# Altium PCB PCB2.PcbDoc
Units mm, origin at the board's own origin, x right, y up, seen from the top; angles counter-clockwise.
Board outline 80.26 x 88.77 mm, 2 copper layers (Top Layer, Bottom Layer), stack 1.1 mm thick; 35 components, 36 nets, 142 pads, 58 vias.
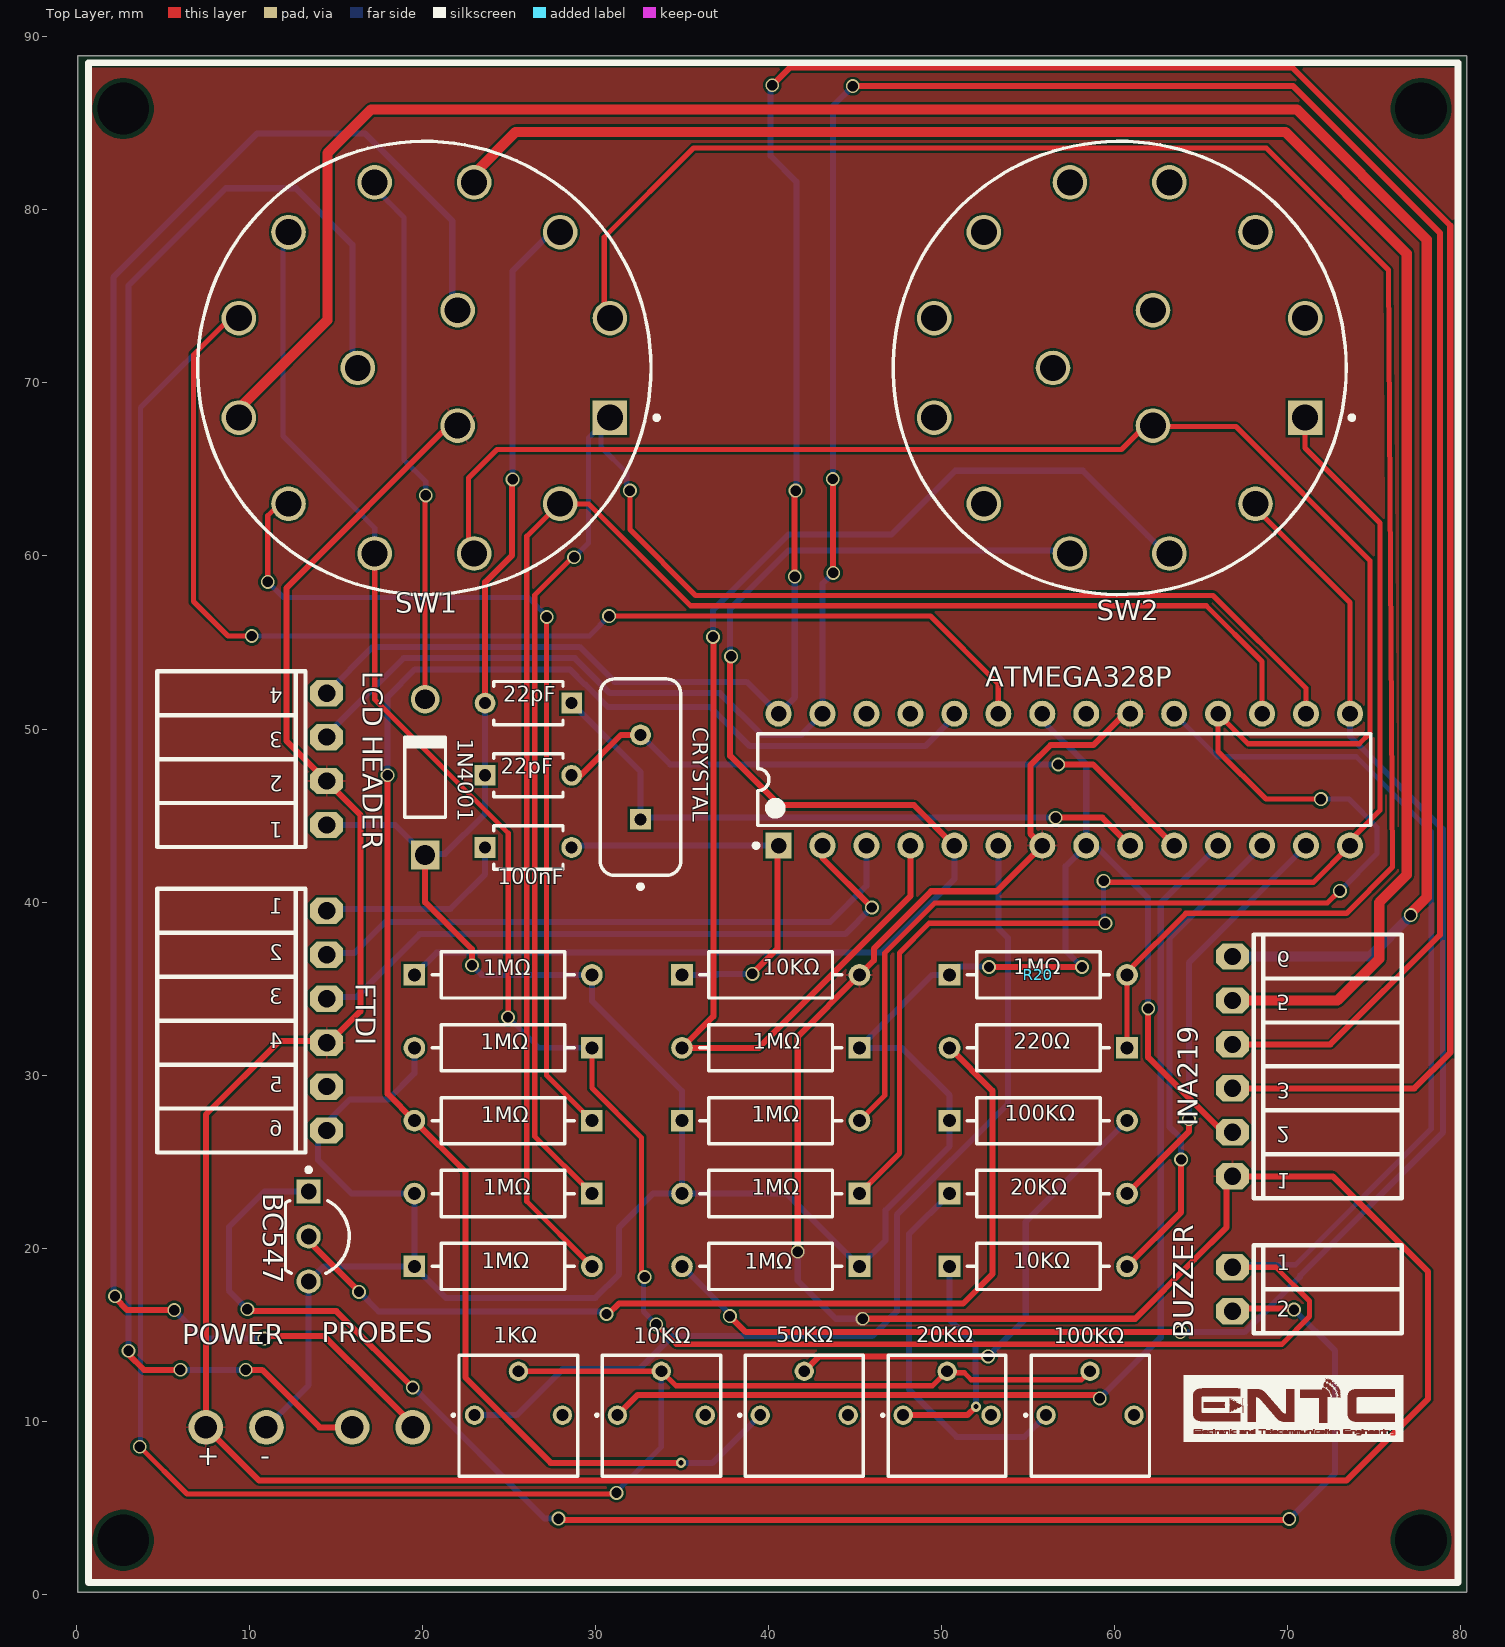
[diagram p0: Top Layer view]
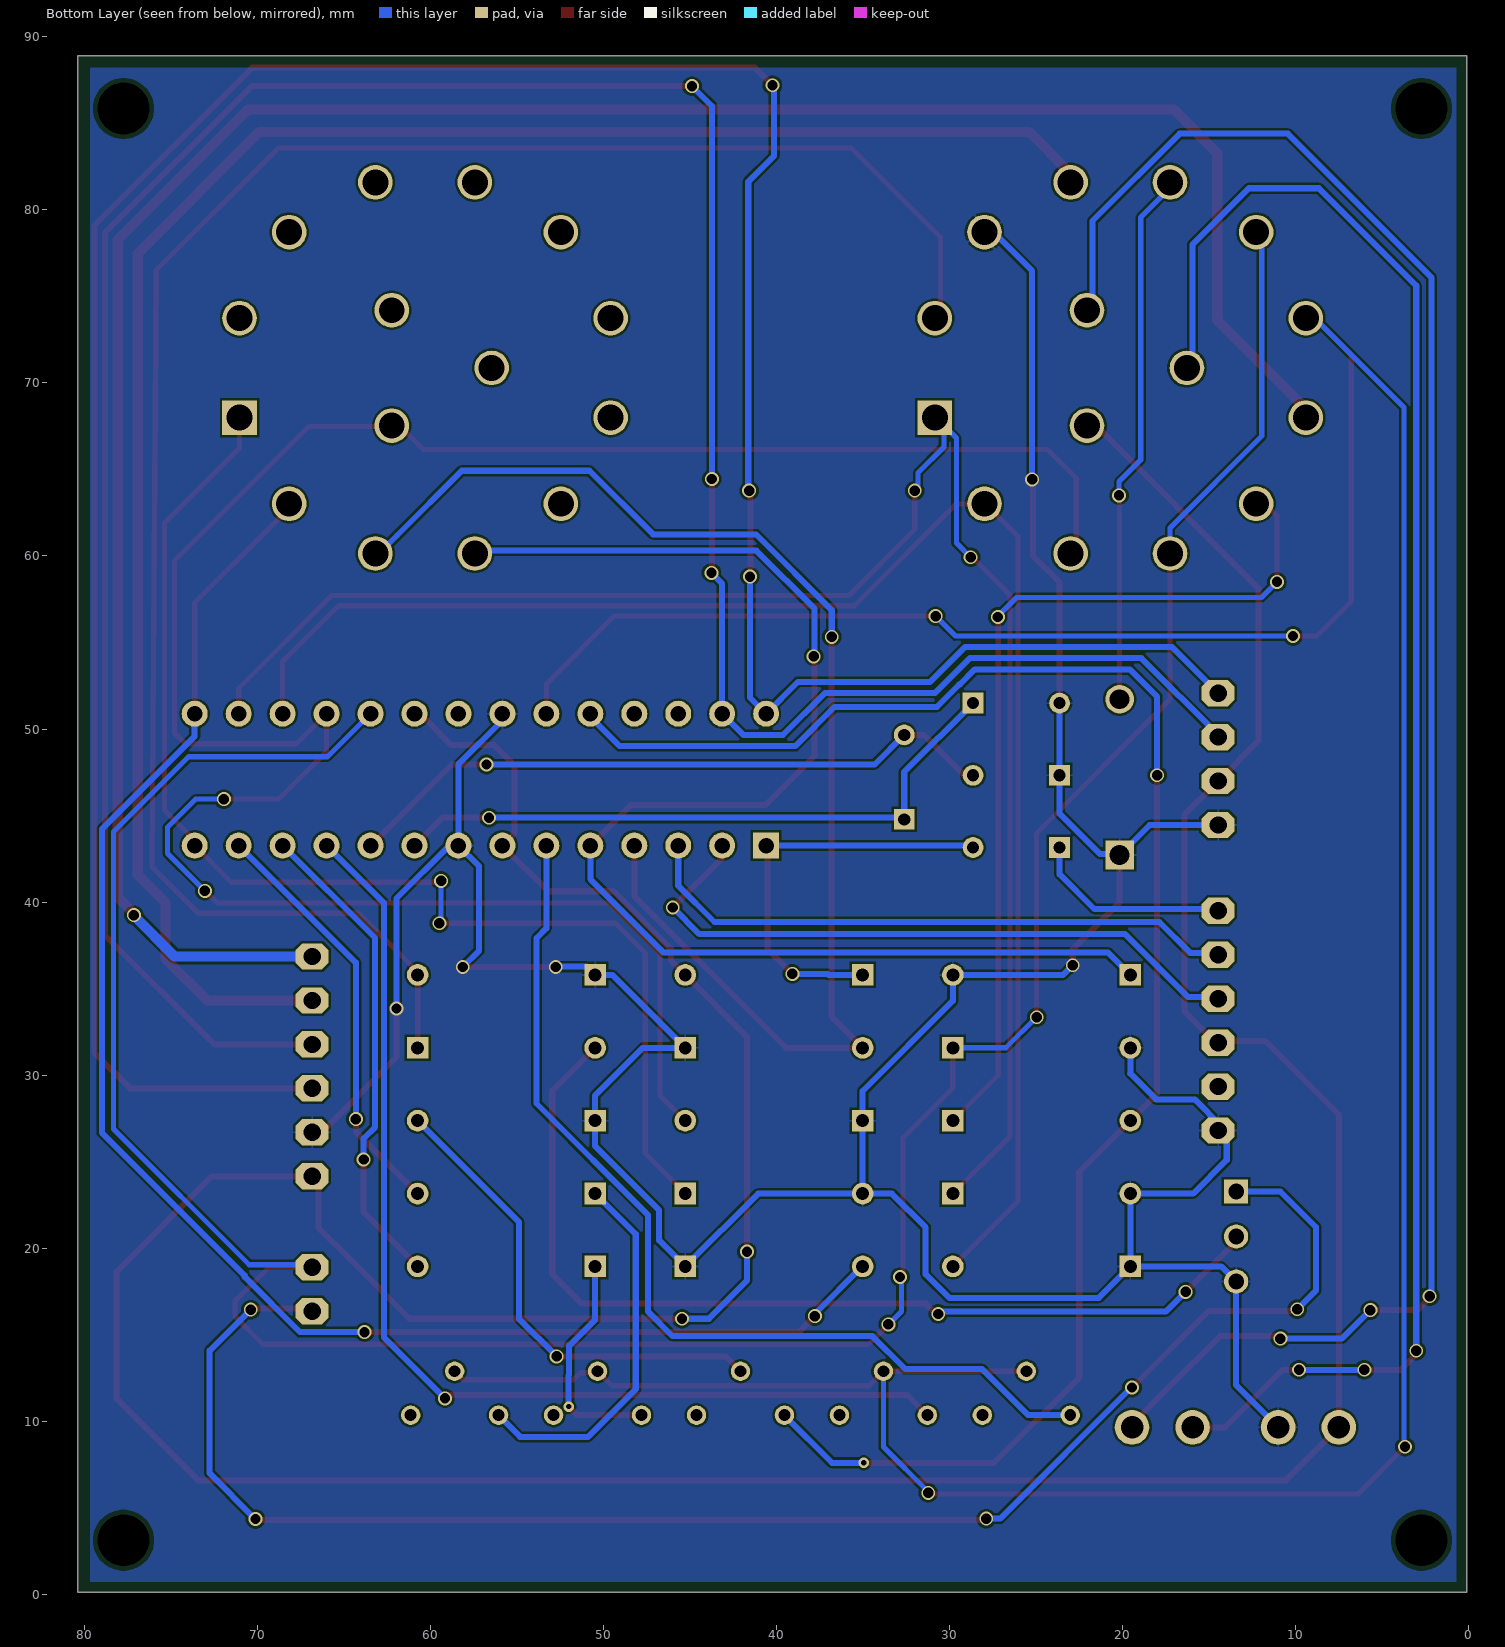
[diagram p1: Bottom Layer view, seen from below]
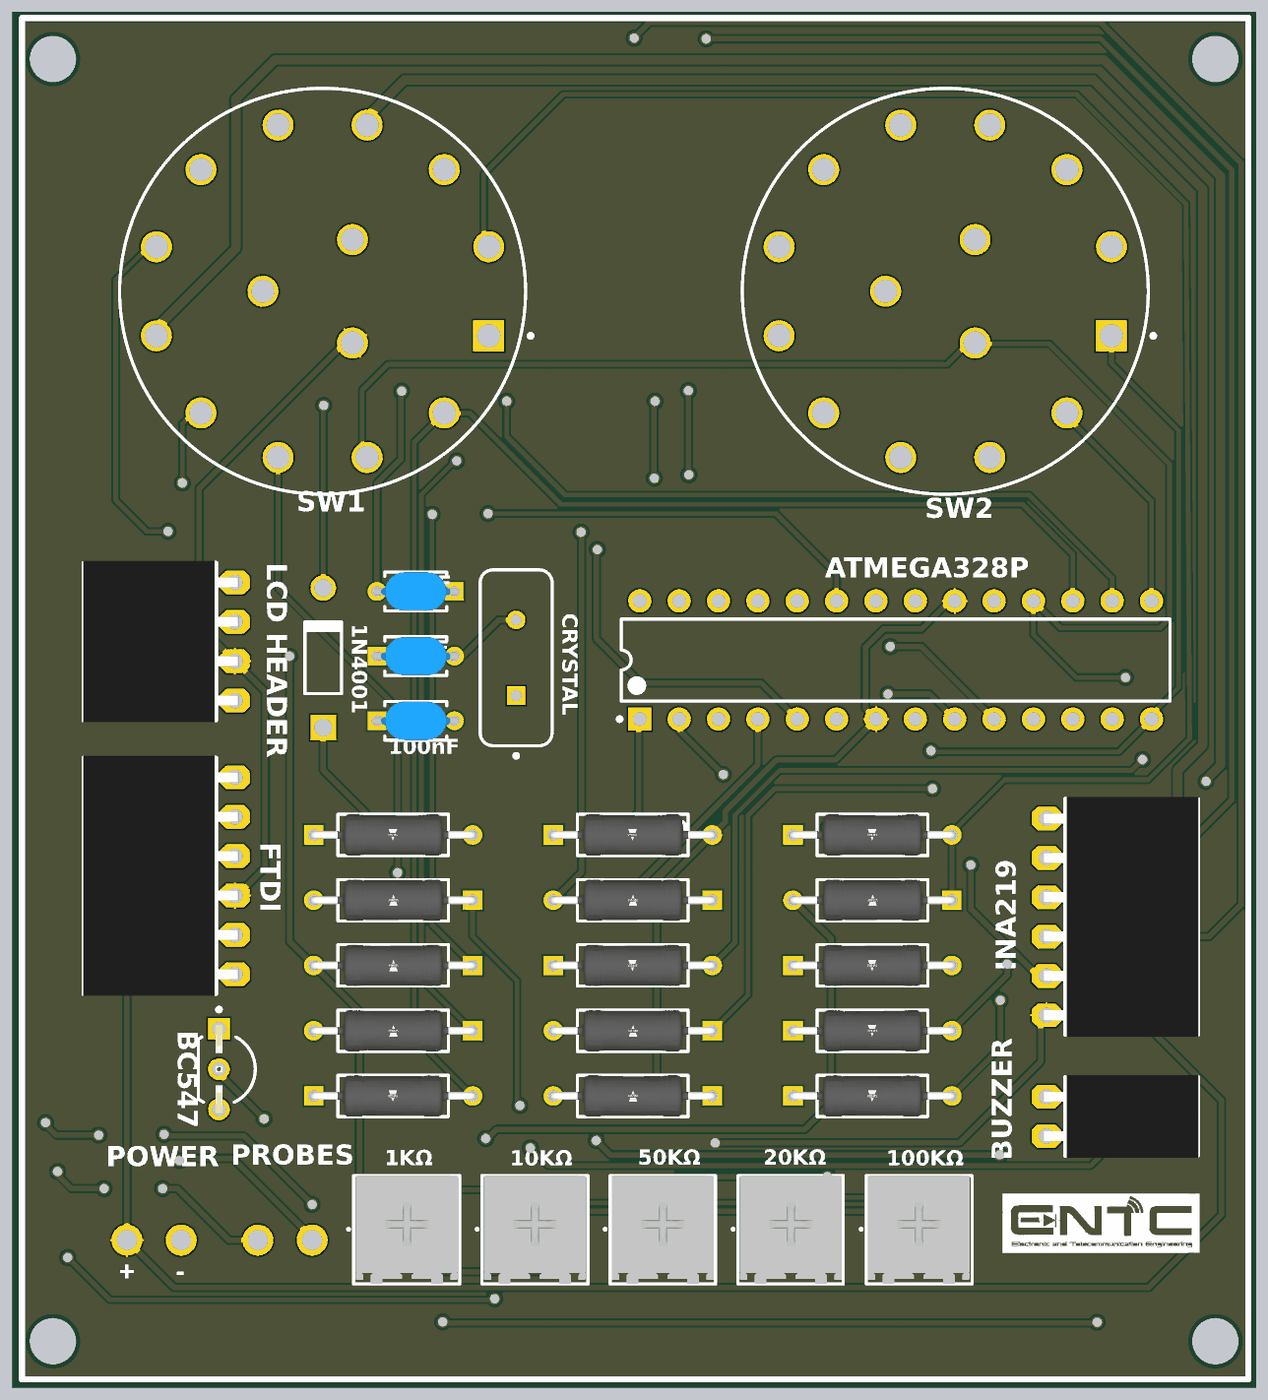
[diagram p2: 3D render of the assembled board from above, using the file's embedded part models]

## Layer stack, top to bottom
Top Solder: solder mask 0.05, Solder Resist, Dk 3.5
Top Layer: signal copper 0.1
Dielectric 1: dielectric 0.9, FR-4, Dk 4.8
Bottom Layer: signal copper 0.1
Bottom Solder: solder mask 0.05, Solder Resist, Dk 3.5

## Board outline
0.1,0.125 80.364,0.125 80.364,88.9 0.1,88.9

## Design rules (kind name [scope] priority, off if disabled: settings)
AssemblyTestPointUsage [All] p1: valid=2
BoardOutlineClearance [All] p1: gap=0.2 ignorepadtopadclearanceinfootprint=FALSE
Clearance [All] p1: gap=0.127 ignorepadtopadclearanceinfootprint=FALSE except(0.25: Arc-Hole Track-Hole SMDPad-Hole THPad-Hole Via-Hole Fill-Hole Poly-Hole Region-Hole Text-Hole)
ComponentClearance [All] p1: gap=0.127 collisioncheckmode=3 verticalgap=0.127 showdistances=TRUE
DiffPairsRouting [All] p1: maxlimit=0.254 minlimit=0.127 mostfreqgap=0.127 toplayer_minwidth=0.127 toplayer_maxwidth=25.4 toplayer_prefwidth=0.127 bottomlayer_minwidth=0.127 bottomlayer_maxwidth=25.4 bottomlayer_prefwidth=0.127 maxuncoupledlength=12.7
FabricationTestPointUsage [All] p1: valid=2 allowmultiple=FALSE
Height [All] p1: minheight=0 maxheight=1816.048 prefheight=12.7
HoleSize [All] p1: absolutevalues=TRUE maxlimit=6.3 minlimit=0.3 maxpercent=80.000 minpercent=20.000
HoleToHoleClearance [All] p1: gap=0.25 allowstackedmicrovias=FALSE
MinimumAnnularRing [All] p1: minimumring=0.076
MinimumSolderMaskSliver [All] p1: minsoldermaskwidth=0
PlaneClearance [All] p1: clearance=0.127
PlaneConnect PlaneConnectPowerPads [InPadClass('PowerPads')] p1: planeconnectstyle=Direct reliefexpansion=0.508 reliefentries=4 reliefconductorwidth=0.254 reliefairgap=0.254
PlaneConnect [All] p2: pad.planeconnectstyle=Relief pad.reliefexpansion=0.3 pad.reliefentries=4 pad.reliefconductorwidth=0.127 pad.reliefairgap=0.127 via.planeconnectstyle=Direct via.reliefexpansion=0.3 via.reliefentries=4 via.reliefconductorwidth=0.127 via.reliefairgap=0.127
PolygonConnect PolygonConnectPowerPads [All vs (InPadClass('PowerPads'))] p1: connectstyle=Direct reliefconductorwidth=0.254 reliefentries=4 polygonreliefangle="90 Angle" airgapwidth=0.254
PolygonConnect [All] p2: thpad.connectstyle=Relief thpad.reliefconductorwidth=0.127 thpad.reliefentries=4 thpad.polygonreliefangle="90 Angle" thpad.airgapwidth=0.127 smdpad.connectstyle=Relief smdpad.reliefconductorwidth=0.127 smdpad.reliefentries=4 smdpad.polygonreliefangle="90 Angle" smdpad.airgapwidth=0.127 via.connectstyle=Direct via.reliefconductorwidth=0.127 via.reliefentries=4 via.polygonreliefangle="90 Angle" via.airgapwidth=0.127
RoutingVias [All] p1: holewidth=0.3 width=0.6 viastyle="Through Hole" minholewidth=0.3 minwidth=0.6 maxholewidth=0.6 maxwidth=6.6
SilkToSilkClearance [All] p1: silktosilkclearance=0
SilkToSolderMaskClearance [IsPad] p1: minsilkscreentomaskgap=0.127 clearancetoexposedcopper=TRUE
SolderMaskExpansion [All] p1: expansion=0.075 istentingtop=FALSE
Width [All] p1: maxlimit=25.4 minlimit=0.127 preferedwidth=0.127 minimp=50.000000 maximp=50.000000 favimp=50.000000
18 further rules are at their usual default settings.

## Classes and differential pairs
component class Schematic2: BUZZER C1 C2 C3 D1 J2 J5 P2 P3 P4 Q1 R1 R2 R3 R4 R5 R6 R7 R8 R10 R11 R12 R13 R15 R18 R19 R20 SW1 SW2 U1 Y1

## Components (designator, comment, footprint, x,y, rotation, side; value= is the part's Value field where it differs from the comment)
1KΩ "3362P-1-203LF" 3362P_1 25.558,6.82 r0 top (schematic designator R5)
1MΩ "G001R1000FE1280" FP-G001R1000FE1280-MFG 24.677,35.791 r0 top (schematic designator R11)
1MΩ "G001R1000FE1280" FP-G001R1000FE1280-MFG 40.138,31.58 r180 top (schematic designator R10)
1MΩ "G001R1000FE1280" FP-G001R1000FE1280-MFG 24.677,31.58 r180 top (schematic designator R9)
1MΩ "G001R1000FE1280" FP-G001R1000FE1280-MFG 40.138,27.369 r0 top (schematic designator R8)
1MΩ "G001R1000FE1280" FP-G001R1000FE1280-MFG 24.677,27.369 r180 top (schematic designator R7)
1MΩ "G001R1000FE1280" FP-G001R1000FE1280-MFG 40.138,23.158 r180 top (schematic designator R4)
1MΩ "G001R1000FE1280" FP-G001R1000FE1280-MFG 40.138,18.947 r180 top (schematic designator R3)
1MΩ "G001R1000FE1280" FP-G001R1000FE1280-MFG 24.677,23.158 r180 top (schematic designator R2)
1MΩ "G001R1000FE1280" FP-G001R1000FE1280-MFG 24.677,18.947 r0 top (schematic designator R1)
1N4001 "1N4001-T" DIOD-DO-41-P-2_V 20.166,47.221 r90 top (schematic designator D1)
10KΩ "G001R1000FE1280" FP-G001R1000FE1280-MFG 55.599,18.947 r0 top (schematic designator R14)
10KΩ "G001R1000FE1280" FP-G001R1000FE1280-MFG 40.138,35.791 r0 top (schematic designator R13)
10KΩ "3362P-1-203LF" 3362P_1 33.816,6.82 r0 top (schematic designator R6)
20KΩ "G001R1000FE1280" FP-G001R1000FE1280-MFG 55.599,23.158 r0 top (schematic designator R15)
20KΩ "3362P-1-203LF" 3362P_1 50.332,6.82 r0 top (schematic designator R17)
22pF "RDE5C1H220J0K1H03B" FP-RDE0M1-MFG 26.135,47.327 r0 top (schematic designator C2)
22pF "RDE5C1H220J0K1H03B" FP-RDE0M1-MFG 26.135,51.497 r180 top (schematic designator C1)
50KΩ "3362P-1-203LF" 3362P_1 42.074,6.82 r0 top (schematic designator R12)
100KΩ "G001R1000FE1280" FP-G001R1000FE1280-MFG 55.599,27.369 r0 top (schematic designator R16)
100KΩ "3362P-1-203LF" 3362P_1 58.59,6.82 r0 top (schematic designator R18)
100nF "RDE5C1H220J0K1H03B" FP-RDE0M1-MFG 26.135,43.157 r0 top (schematic designator C3)
220Ω "G001R1000FE1280" FP-G001R1000FE1280-MFG 55.599,31.58 r180 top (schematic designator R19)
ATMEGA328P "ATmega328P-PN" 28P3 57.1,47.075 r90 top (schematic designator U1)
BC547 "BC547BRL1G" ONSC-TO-92-3-29-11_AM_BL 13.435,20.678 r270 top (schematic designator Q1)
BUZZER "Header 2" MY_FE02W 66.825,17.63 r270 top (schematic designator P1)
CRYSTAL "FOXSLF/160-20" FOX-FOXSLF160-20 32.612,47.221 r90 top (schematic designator Y1)
FTDI "Header 6" MY_FE06W 14.475,33.15 r270 top (schematic designator P4)
INA219 "Header 6" MY_FE06W 66.825,30.505 r90 top (schematic designator P3)
"LCD HEADER" "Header 4" MY_FE04W 14.475,48.265 r90 top (schematic designator P2)
POWER "691214110002" 691214110002 9.25,9.95 r0 top (schematic designator J5)
PROBES "691214110002" 691214110002 17.7,9.95 r0 top (schematic designator J2)
R20 "G001R1000FE1280" FP-G001R1000FE1280-MFG 55.599,35.791 r0 top
SW1 "A30403RNZQ" CKCP-A30403RNZQ-15_V 20.125,70.866 r0 top
SW2 "A30403RNZQ" CKCP-A30403RNZQ-15_V 60.3,70.866 r0 top

## Footprints (in the part's own frame and the unit in brackets; to place one, negate y for a bottom-side part, rotate by r counter-clockwise, add the part's x,y. Pads: shape width x height; smd on the part's side, far side on the other; paste and mask are expansions set on the pad)
28P3 [mm] "28-Pin Plastic Dual In-Line Package (PDIP)"
  rect 1.5x1.5 hole 0.9: 1(-3.81,16.51)
  round 1.5 hole 0.9: 2(-3.81,13.97) 3(-3.81,11.43) 4(-3.81,8.89) 5(-3.81,6.35) 6(-3.81,3.81) 7(-3.81,1.27) 8(-3.81,-1.27) 9(-3.81,-3.81) 10(-3.81,-6.35) 11(-3.81,-8.89) 12(-3.81,-11.43) 13(-3.81,-13.97) 14(-3.81,-16.51) 15(3.81,-16.51) 16(3.81,-13.97) 17(3.81,-11.43) 18(3.81,-8.89) 19(3.81,-6.35) 20(3.81,-3.81) 21(3.81,-1.27) 22(3.81,1.27) 23(3.81,3.81) 24(3.81,6.35) 25(3.81,8.89) 26(3.81,11.43) 27(3.81,13.97) 28(3.81,16.51)
  silkscreen extent -3.93,-17.7 2.65,17.93, body extent -3.6,-17.65 3.6,17.65, height 4.58
3362P_1 [mm]
  round 1.12 hole 0.69: 1(-2.54,3.53) 2(0,6.07) 3(2.54,3.53)
  silkscreen extent -3.81,0 3.42,6.99, body extent -3.3,0.01 3.3,7, height 4.65
691214110002 [mm] "3.50 mm Horizontal Entry Modular, 2p"
  round 2 hole 1.3: 1(-1.75,-0.3) 2(1.75,-0.3)
CKCP-A30403RNZQ-15_V [mm] "Rotary Switch, A, 1-3, B, 4-6, C, 7-9, D, 10-12 Terminals, Dia 26.19mm, Height 32.02mm"
  rect 2x2 hole 1.5: 1(10.722,-2.873)
  round 2 hole 1.5: 2(7.849,-7.849) 3(2.873,-10.722) 4(-2.873,-10.722) 5(-7.849,-7.849) 6(-10.722,-2.873) 7(-10.722,2.873) 8(-7.849,7.849) 9(-2.873,10.722) 10(2.873,10.722) 11(7.849,7.849) 12(10.722,2.873) A(1.925,-3.334) B(-3.85,0) C(1.925,3.334)
  silkscreen extent -13.09,-13.09 13.54,13.09, body extent -12.99,-13.07 13.09,13.07, height 32
DIOD-DO-41-P-2_V [mm] "2-Leads, Axial Lead, Body 4.635x2.36mm, Pin Spacing 9mm"
  rect 1.65x1.65 hole 1.15: 1(-4.5,0)
  round 1.65 hole 1.15: 2(4.5,0)
  silkscreen extent -2.32,-1.18 2.32,1.18, body extent -4.93,-1.18 4.93,1.18, height 2.35
FOX-FOXSLF160-20 [mm] "THD, 2-Leads, Body 11.35x4.65mm"
  rect 1.2x1.2 hole 0.7: 1(-2.44,0)
  round 1.2 hole 0.7: 2(2.44,0)
  silkscreen extent -6.45,-2.32 5.68,2.32, body extent -5.67,-2.32 5.68,2.33, height 3.6
FP-G001R1000FE1280-MFG [mm]
  rect 1.25x1.25 hole 0.75 paste-1000 mask+0: 1(-5.128,0)
  round 1.25 hole 0.75 paste-1000 mask+0: 2(5.128,0)
  silkscreen extent -4.1,-1.33 4.1,1.33, body extent -5.85,-1.43 5.85,1.43, height 0.25
FP-RDE0M1-MFG [mm]
  rect 1.2x1.2 hole 0.7 paste-1000 mask+0: 1(-2.5,0)
  round 1.2 hole 0.7 paste-1000 mask+0: 2(2.5,0)
  silkscreen extent -2,-1.25 2,1.25, body extent -3.2,-1.35 3.2,1.35, height 0.25
MY_FE02W [mm]
  oct 1.524x1.905 hole 1: 1(-1.27,0) 2(1.27,0)
  silkscreen extent -2.54,1.22 2.54,9.78, body extent -2.67,-0.25 2.66,9.81, height 2.52
MY_FE04W [mm]
  oct 1.524x1.905 hole 1: 1(-3.81,0) 2(-1.27,0) 3(1.27,0) 4(3.81,0)
  silkscreen extent -5.08,1.22 5.08,9.78, body extent -5.2,-0.25 5.21,9.81, height 2.52
MY_FE06W [mm]
  oct 1.524x1.905 hole 1: 1(-6.35,0) 2(-3.81,0) 3(-1.27,0) 4(1.27,0) 5(3.81,0) 6(6.35,0)
  silkscreen extent -7.62,-9.78 7.62,-1.22, body extent -7.75,-9.81 7.74,0.25, height 2.52
ONSC-TO-92-3-29-11_AM_BL [mm] "TO, 3-Leads, Body Dia 4.7mm, Pitch 2.6mm"
  rect 1.4x1.4 hole 0.9: 1(-2.6,0)
  round 1.4 hole 0.9: 2(0,0) 3(2.6,0)
  silkscreen extent -3.97,-1.34 2.13,2.35, body extent -2.84,-1.34 2.84,2.35, height 5.33

## Part data
1KΩ 10KΩ 20KΩ 50KΩ 100KΩ: "Resistor", Manufacturer_Name=Bourns, Mouser Part Number=652-3362P-1-203LF, Arrow Part Number=3362P-1-203LF, Arrow Price/Stock=https://www.arrow.com/en/products/3362p-1-203lf/bourns?region=europe, Datasheet Link=https://www.bourns.com/docs/Product-Datasheets/3362.pdf, Manufacturer_Part_Number=3362P-1-203LF, Mouser Price/Stock=https://www.mouser.co.uk/ProductDetail/Bourns/3362P-1-203LF?qs=GslmPyR0hhF1JBua3W6Xbw%3D%3D
1MΩ 1MΩ 1MΩ 1MΩ 1MΩ 1MΩ 1MΩ 1MΩ 1MΩ 10KΩ 10KΩ 20KΩ 100KΩ 220Ω R20: library part CMP-02408-000025-1, "Res Wirewound 0.1 Ohm 1% 1W ±90ppm/°C Ceramic Hi Temp Sil AXL Thru-Hole Bulk", Case/Package=Ceramic, Max Operating Temperature=250°C, Min Operating Temperature=-65°C, Power Rating=1W, Resistance=100mR, Resistor Type=Wirewound, Temperature Coefficient=90ppm/°C, Tolerance=1%, Construction=Cylindrical, Contact Plating=Tin, Diameter=2.16mm, Lead Free="Lead Free", Length=7.14mm, Military Standard=Not, Mount="Through Hole", Packaging="Tape and Reel", Radiation Hardening=No, RoHS Compliant=Yes, Series=G, Termination=Axial
1N4001: library part CMP-0639-00006-2, "1.0 A Rectifier, 15 pF, 50 V, -65 to 150 degC, 2-Pin DO-41 Plastic, RoHS, Tape and Reel", Manufacturer="Diodes Inc", Max. Average Rectified Current IO (A)=1, Operating Temperature Range (degC)="-65 to 150", ComponentLink1Description="Manufacturer URL", ComponentLink1URL=http://diodes.com/, ComponentLink2Description=Datasheet, ComponentLink2URL=http://diodes.com/datasheets/ds28002.pdf, CT (pF)=15, DatasheetVersion="Rev. 8-2", Max. IFSM (A)=30, Max. IR (uA)=5, Mounting Technology="Through Hole", PackageDescription="2-Pin Axial Lead, Body 4.635 x 2.36 mm, Lead Spread 25.4 mm", PackageReference=DO-41-P-2, Packing="Tape and Reel", PartNumber=1N4001-T, RoHS=TRUE, VF (V)=1, VRRM (V)=50
22pF 22pF 100nF: library part CMP-06035-055552-1, "Ceramic Capacitor 22pF ±5% 50V C0G Radial", Capacitance=22pF, Case/Package=Radial, Dielectric=C0G, Max Operating Temperature=125°C, Min Operating Temperature=-55°C, Package Quantity=500, Resistor Type=Ceramic, Tolerance=5%, Voltage Rating=50V, Height=3.5mm, Height - Seated (Max)=0.236inch, Lead Diameter=0.5mm, Lead Free="Lead Free", Lead Pitch=0.197inch, Length=0.157inch, Mount="Through Hole", Packaging=Bulk, Termination=Radial, Voltage Rating (DC)=50V, Width=0.098inch
ATMEGA328P: library part CMP-0095-00355-1, "8-bit AVR Microcontroller, 32KB Flash, 1KB EEPROM, 2KB SRAM, 28-pin PDIP, Industrial Grade (-40°C to 105°C)", ComponentLink1Description="Manufacturer URL", ComponentLink1URL=http://www.atmel.com/, ComponentLink2Description="ATmega48A/48PA/88A/88PA/168A/168PA/328/328P Datasheet", ComponentLink2URL=http://www.atmel.com/dyn/resources/prod_documents/8271.pdf, ComponentLink3Description="ATmega48A/48PA/88A/88PA/168A/168PA/328/328P Summary", ComponentLink3URL=http://www.atmel.com/dyn/resources/prod_documents/8271S.pdf, DatasheetVersion="revD, May-2011", PackageDescription="28-lead (0.300\"/7.62mm Wide) Plastic Dual Inline Package (PDIP)", PackageReference=28P3, PackageVersion="revB, Sep-2001"
BC547: library part CMP-1048-01605-1, "Amplifier Transistor, NPN Silicon, 3-Pin TO-92, Pb-Free, Tape and Reel", Manufacturer="On Semiconductor", ComponentLink1Description="Manufacturer URL", ComponentLink1URL=http://www.onsemi.com/, ComponentLink2Description=Datasheet, ComponentLink2URL=http://www.onsemi.com/pub_link/Collateral/BC546-D.PDF, ComponentLink3Description="Package Specification", ComponentLink3URL=http://www.onsemi.com/pub_link/Collateral/MAC97-D.PDF, DatasheetVersion="Rev. 7", fT Min (MHz)=150, IC Continuous (A)=0.1, Mounting Technology="Through Hole", PackageDescription="3-Pin Transistor Outline, Body 4.825 x 3.685 mm, Pitch 1.27 mm", PackageReference=TO-92-3-29-11_AM_BL, PackageVersion="Rev. AM", Packing="Tape and Reel", PartNumber=BC547BRL1G, Polarity=NPN, RoHS=TRUE
BUZZER: "Header, 2-Pin", ASiD Part Number="Header 2-AS"
CRYSTAL: library part CMP-1749-00003-1, "Resistance Weld Thru-Hole Crystal, 16 MHz, -20 to 70 degC, 2-Pin THD, RoHS, Bulk", Case\Package=Axial, Max Operating Temperature="155 degC", Min Operating Temperature="-55 degC", Package Quantity=200, Power Rating="250 mW", Resistance="221 kohm", Tolerance=1%, Voltage Rating="250 V", ComponentLink1Description="Manufacturer URL", ComponentLink1URL=http://www.foxonline.com/, ComponentLink2Description=Datasheet, ComponentLink2URL=http://www.foxonline.com/pdfs/hc49slf.pdf, DatasheetVersion=Mar-15, Length="0.248 inch", Mount="Through Hole", PackageDescription="2-Pin Through Hole Device, Body 11.35 x 4.65 mm", PackageReference=FOXSLF160-20, Packaging=Bulk, RoHSCompliant=true
FTDI INA219: "Header, 6-Pin", ASiD Part Number="Header 6-AS"
"LCD HEADER": "Header, 4-Pin", ASiD Part Number="Header 4-AS"
POWER PROBES: library part CMP-1502-02464-1, "Serie 2141 - 3.50 mm Horizontal Entry Modular with Rising Cage Clamp WR-TBL, 2 pin", Manufacturer="Wurth Elektronik", Operating Temperature=-40to105degC, Datasheet URL=http://katalog.we-online.de/em/datasheet/6912141100xx.pdf, Manufacturer URL=http://www.we-online.de, Mounting Technology=THT, Package Reference=691214110002, Packaging=Box, Part Number=691214110002, Pin Number=2, Pitch=3.50mm, Publisher=WurthElektronik
SW1 SW2: library part CMP-1076-00008-1, "A Series Rotary Switch, 3 Poles, 4 Positions, 30 deg Angle of Throw, -30 to 85 degC, RoHS", Manufacturer="C&K Components", Temperature Range="-30 to 85 degC", Angle of Throw="30 deg", ComponentLink1Description="Manufacturer URL", ComponentLink1URL=http://www.ck-components.com/, ComponentLink2Description=Datasheet, ComponentLink2URL=http://www.ck-components.com/13397/arotary_9apr14.pdf/, ComponentLink3Description="Package Specification", ComponentLink3URL=http://www.ck-components.com/13397/arotary_9apr14.pdf/, DatasheetVersion=41821, Mounting Technology="Through Hole", PackageDescription="15-Pin Through Hole Device, Dia 26.19 mm, Height 32.02 mm", PackageReference=A30403RNZQ-15, PartNumber=A30403RNZQ, Pole=3, Position=4, RoHS=TRUE, Series=A

## Free pads (board coordinates)
  round 1.3 hole 3 unplated: 2(2.725,85.85) 3(77.725,85.85) 4(77.725,3.125) 5(2.725,3.125)

## Via types
v1: diameter 0.8, hole 0.6, Top Layer to Bottom Layer, tented both sides, 56 vias
v2: diameter 0.6, hole 0.3, Top Layer to Bottom Layer, tented both sides, 2 vias

## Nets (pads, with @x,y where several pads share a name; then routed paths per layer and width w, separated by ;. In a path a pad name is that pad's centre, name@x,y a point inside that pad or via, vN(x,y) a via of type N, cw(c..) or ccw(c..) an arc to the next point about the centre after c; other vN are vias at no path point)
A0: 1KΩ.2 10KΩ.2@33.816,12.89 20KΩ.2@50.332,12.89 100KΩ.2@58.59,12.89 ATMEGA328P.23 SW1.7 | length 207.8
  Top Layer w0.3: v1(3.675,8.525) 6.4,5.8 31.164,5.8 v1(31.225,5.861) ; SW1.7@9.403,73.807 8.96,73.807 6.778,71.625 6.778,57.372 8.775,55.375 v1(10.15,55.375) ; 1KΩ.2 33.816,12.89 34.656,12.05 49.492,12.05 50.332,12.89 50.422,12.8 51.325,12.8 51.725,12.4 58.1,12.4 100KΩ.2@58.59,12.89 ; v1(30.8,56.525) 49.375,56.525 53.29,52.61 ATMEGA328P.23
  Bottom Layer w0.3: v1(3.675,8.525) 3.725,8.575 3.725,68.572 8.96,73.807 SW1.7@9.403,73.807 ; v1(10.15,55.375) 29.65,55.375 v1(30.8,56.525) ; v1(31.225,5.861) 31.225,5.925 33.816,8.516 10KΩ.2@33.816,12.89
A1: 1MΩ.2@19.549,27.369 50KΩ.1 ATMEGA328P.24 | length 97.6
  Top Layer w0.35: v1(18,47.325) 18,28.918 19.549,27.369 22.5,24.418 22.5,12.525 27.425,7.6 v2(34.95,7.6)
  Bottom Layer w0.35: v1(18,47.325) 18,51.875 19.575,53.45 28.525,53.45 29.403,52.572 29.432,52.572 30.729,51.275 36.65,51.275 38.915,49.01 49.06,49.01 50.75,50.7 ATMEGA328P.24 ; v2(34.95,7.6) 36.784,7.6 50KΩ.1
A4: "LCD HEADER.3" ATMEGA328P.27 INA219.4 | length 162.8
  Top Layer w0.35: v1(43.725,64.45) 43.725,59.05 v1(43.75,59.025) ; v1(44.875,87.15) 70.325,87.15 78.8,78.675 78.8,38.1 72.475,31.775 68.875,31.775 INA219.4
  Bottom Layer w0.35: 14.599,49.535 14.475,49.535 14.475,49.658 18.917,54.1 28.823,54.1 30.848,52.075 37.2,52.075 39.615,49.66 41.905,49.66 ATMEGA328P.27 43.13,58.405 v1(43.75,59.025) ; v1(43.725,64.45) 43.875,64.6 43.725,64.75 43.725,86 v1(44.875,87.15)
A5: "LCD HEADER.4" ATMEGA328P.28 INA219.3 | length 170.8
  Top Layer w0.35: v1(40.225,87.2) 41.239,88.214 70.286,88.214 79.404,79.096 79.404,31.304 77.335,29.235 68.875,29.235 INA219.3 ; v1@41.508,58.81 41.508,63.708 v1(41.575,63.775)
  Bottom Layer w0.35: 14.475,52.075 17.15,54.75 29.092,54.75 31.117,52.725 38.75,52.725 ATMEGA328P.28 41.525,51.82 v1(41.525,58.81) ; v1(40.225,87.2) 40.125,87.1 40.125,83.125 41.625,81.625 41.625,63.825 v1(41.575,63.775)
COLLECTOR: BC547.1 BUZZER.2 | length 94
  Top Layer w0.35: v1(9.9,16.475) 10.01,16.365 15.035,16.365 v1(19.45,11.95) ; v1(27.875,4.375) 27.95,4.3 70.05,4.3 v1(70.1,4.35) ; BUZZER.2@66.475,16.505 70.32,16.505 v1(70.375,16.45)
  Bottom Layer w0.35: v1(9.9,16.475) 8.825,17.55 8.825,21.225 10.878,23.278 BC547.1 ; v1(19.45,11.95) 19.5,11.95 27.075,4.375 v1(27.875,4.375) ; v1(70.1,4.35) 72.75,7 72.75,14.075 v1(70.375,16.45)
CRS1: 22pF.1@28.635,51.497 ATMEGA328P.9 CRYSTAL.1 | length 37.4
  Top Layer w0.35: v1(56.603,44.878) 59.297,44.878 ATMEGA328P.9
  Bottom Layer w0.35: 22pF.1@28.635,51.497 32.612,47.52 CRYSTAL.1 32.709,44.878 v1(56.603,44.878)
CRS2: 22pF.2@28.635,47.327 ATMEGA328P.10 CRYSTAL.2 | length 38.4
  Top Layer w0.35: 22pF.2@28.635,47.327 29.152,47.327 31.486,49.661 CRYSTAL.2 ; v1(56.75,47.95) 58.765,47.95 ATMEGA328P.10
  Bottom Layer w0.35: CRYSTAL.2 34.323,47.95 v1(56.75,47.95)
D2: 1MΩ.2@35.01,31.58 ATMEGA328P.4 SW2.3 | length 77.5
  Top Layer w0.35: v1(36.8,55.325) 36.825,55.3 36.825,33.395 35.01,31.58 39.445,31.58 48.21,40.345 ATMEGA328P.4
  Bottom Layer w0.35: v1(36.8,55.325) 36.8,56.867 41.179,61.246 47.121,61.246 50.8,64.925 58.179,64.925 61.922,61.182 62.96,60.144 SW2.3
D3: 1MΩ.1@19.549,35.791 ATMEGA328P.5 SW2.4 | length 80.2
  Top Layer w0.35: v1(37.85,54.2) 37.794,54.144 37.794,48.456 40.65,45.6 48.415,45.6 ATMEGA328P.5
  Bottom Layer w0.35: 1MΩ.1@19.549,35.791 20.833,37.075 46.5,37.075 50.75,41.325 ATMEGA328P.5 ; v1(37.85,54.2) 37.794,54.256 37.794,56.942 41.162,60.31 49.914,60.31 57.261,60.31 SW2.4
D4: 1KΩ.1 ATMEGA328P.6 | length 56.7
  Bottom Layer w0.35: 1KΩ.1 25.45,10.35 28.114,13.014 32.539,13.014 34.45,14.925 46,14.925 47.425,16.35 47.425,21.925 53.86,28.36 53.86,37.915 53.29,38.485 ATMEGA328P.6
D5: 10KΩ.1@31.276,10.35 ATMEGA328P.11 | length 63.2
  Top Layer w0.35: 10KΩ.1@31.276,10.35 32.451,11.525 58.95,11.525 v1(59.15,11.325)
  Bottom Layer w0.35: v1(59.15,11.325) 62.675,14.85 62.675,39.95 ATMEGA328P.11
D6: 10KΩ.2@60.727,18.947 ATMEGA328P.12 | length 28.1
  Top Layer w0.35: 10KΩ.2@60.727,18.947 63.85,22.07 v1(63.85,25.125)
  Bottom Layer w0.35: v1(63.85,25.125) 63.85,26.34 63.19,27 63.19,37.925 ATMEGA328P.12
D7: 20KΩ.2@60.727,23.158 ATMEGA328P.13 | length 24.4
  Top Layer w0.35: 20KΩ.2@60.727,23.158 64.3,26.732 v1(64.3,27.459)
  Bottom Layer w0.35: v1(64.3,27.459) 64.3,36.495 ATMEGA328P.13
D8: 1MΩ.1@45.266,23.158 ATMEGA328P.14 SW2.1 | length 72.4
  Top Layer w0.3: 1MΩ.1@45.266,23.158 47.575,25.468 47.575,37.059 49.291,38.775 v1(59.475,38.775) ; v1(59.375,41.225) 59.45,41.15 71.495,41.15 ATMEGA328P.14 73.61,43.568 75.35,45.308 75.35,61.9 71.017,66.233 SW2.1@71.017,67.988
  Bottom Layer w0.3: v1(59.375,41.225) 59.375,38.775 v1(59.475,38.775)
D9: 1MΩ.2@35.01,18.947 ATMEGA328P.15 SW2.2 | length 91.3
  Top Layer w0.3: SW2.2 68.149,62.769 69.033,61.884 73.61,57.307 ATMEGA328P.15
  Top Layer w0.35: v1(37.775,16.075) 38.7,15.15 51.364,15.15 v1(63.8,15.15)
  Bottom Layer w0.35: 1MΩ.2@35.01,18.947 35.028,18.947 37.775,16.2 v1(37.775,16.075) ; v1(63.8,15.15) 65.549,15.15 67.526,15.15 70.72,18.344 70.72,18.42 78.975,26.675 78.975,44.213 73.61,49.578 ATMEGA328P.15
D10: 1MΩ.1@29.804,23.158 ATMEGA328P.16 SW1.1 | length 99.3
  Top Layer w0.3: v1(28.775,59.925) 28.675,59.925 26.5,57.75 26.5,26.462 1MΩ.1@29.804,23.158 ; v1(32,63.775) 32,61.525 35.8,57.725 65.7,57.725 71.07,52.355 ATMEGA328P.16
  Bottom Layer w0.3: v1(28.775,59.925) 29.6,60.75 29.6,63.746 29.6,66.815 30.363,67.577 SW1.1@30.847,68.061 ; SW1.1@30.322,67.618 30.322,66.303 31.814,64.811 31.814,63.961 v1(32,63.775)
D11: 1MΩ.2@29.804,18.947 ATMEGA328P.17 SW1.2 | length 93.9
  Top Layer w0.3: 1MΩ.2@29.804,18.947 26.04,22.711 26.04,40.24 26.04,57.768 26.04,61.134 27.974,63.068 27.974,63.085 28.056,63.003 29.622,63.003 35.5,57.125 65.3,57.125 68.53,53.895 ATMEGA328P.17
D12: 1MΩ.2@45.266,27.369 ATMEGA328P.18 SW1.3 SW2.A | length 136.5
  Top Layer w0.3: SW1.3@22.998,60.212 22.673,60.538 22.673,64.498 24.326,66.151 60.41,66.149 61.792,67.532 SW2.A 62.282,67.475 67.025,67.475 74.775,59.725 74.775,49.775 74.15,49.15 67.725,49.15 ATMEGA328P.18 65.99,48.71 68.75,45.95 v1(71.925,45.95) ; 1MΩ.2@45.266,27.369 46.725,28.828 46.725,37.057 49.618,39.95 72.3,39.95 73,40.65 v1(73.025,40.65)
  Bottom Layer w0.3: v1(71.925,45.95) 73.55,45.95 75.175,44.325 75.175,42.8 v1(73.025,40.65)
D13: 1MΩ.1@29.804,31.58 ATMEGA328P.19 BUZZER.1 SW1.4 SW1.8 | length 169
  Top Layer w0.3: SW1.4@17.252,60.212 17.252,51.698 24.975,43.975 24.975,33.37 v1(24.955,33.35) ; 1MΩ.1@29.804,31.58 29.804,29.255 32.675,26.385 32.675,18.512 v1(32.853,18.334) ; v1(33.525,15.6) 34.675,14.45 52.99,14.45 69.675,14.45 71.275,16.05 71.275,16.95 69.325,18.9 BUZZER.1@66.975,18.9
  Bottom Layer w0.3: SW1.8@12.276,78.783 11.951,78.458 11.951,66.924 17.252,61.623 SW1.4@17.252,60.212 ; v1(24.955,33.35) 24.975,33.35 26.745,31.58 1MΩ.1@29.804,31.58 ; v1(32.853,18.334) 32.777,18.258 32.777,16.348 v1(33.525,15.6) ; ATMEGA328P.19 65.935,48.4 73.969,48.4 78.3,44.069 78.3,26.884 70.461,19.045 BUZZER.1@66.475,19.045
GND: 1MΩ.1@19.549,18.947 1MΩ.1@35.01,27.369 1MΩ.1@45.266,18.947 1MΩ.1@45.266,31.58 1MΩ.2@19.549,23.158 1MΩ.2@19.549,31.58 1MΩ.2@29.804,35.791 1MΩ.2@35.01,23.158 1N4001.1 22pF.1@23.635,47.327 22pF.2@23.635,51.497 100KΩ.1@50.471,27.369 "LCD HEADER.1" ATMEGA328P.8 ATMEGA328P.22 BC547.3 FTDI.6 INA219.2 POWER.2 R20.1 SW1.11 | length 215.5
  Top Layer w0.35: 1N4001.1 20.166,39.986 22.875,37.277 v1(22.875,36.35) ; 22pF.2@23.635,51.497 23.635,58.485 25.175,60.025 25.175,64.375 v1(25.225,64.425) ; v1(52.75,36.25) v1(58.125,36.25) ; v1(61.95,33.85) 61.95,31.025 66.28,26.695 INA219.2
  Bottom Layer w0.35: POWER.2 13.435,12.085 13.435,14.709 BC547.3 14.304,18.947 1MΩ.1@19.549,18.947 ; 14.475,44.455 18.432,44.455 1N4001.1 20.231,42.786 21.311,42.786 23.635,45.11 23.635,47.327 22pF.2@23.635,51.497 ; 1MΩ.2@19.475,31.58 19.549,31.58 19.549,30.101 18.05,28.6 15.825,28.6 14.225,27 14.025,26.8 13.975,26.8 13.975,25.1 15.917,23.158 19.549,23.158 1MΩ.1@19.549,18.947 ; v1(22.875,36.35) 23.434,35.791 29.804,35.791 29.804,34.292 35.01,29.086 35.01,27.369 1MΩ.2@35.01,23.158 ; v1(25.225,64.425) 25.225,76.477 27.531,78.783 SW1.11@27.974,78.783 ; v1(52.75,36.25) 52.734,36.266 50.946,36.266 R20.1 49.476,35.791 45.266,31.58 47.72,31.58 50.471,28.829 50.471,27.369 50.471,27.202 50.471,25.896 46.775,22.2 46.775,20.456 45.266,18.947 41.055,23.158 1MΩ.2@35.01,23.158 ; ATMEGA328P.22 55.83,50.495 58.37,47.955 ATMEGA328P.8 57.175,42.07 57.175,37.2 v1(58.125,36.25) ; ATMEGA328P.8@58.373,43.265 58.905,43.265 61.95,40.22 v1(61.95,33.85) ; 1MΩ.1@19.549,18.947 21.371,17.125 30.005,17.125 31.375,18.495 31.375,21.2 33.333,23.158 1MΩ.2@35.01,23.158
NetC3_1: 100nF.1 FTDI.1 | length 11.3
  Bottom Layer w0.35: FTDI.1@14.722,39.601 17.707,39.601 21.626,39.601 23.635,41.61 100nF.1
NetQ1_2: 220Ω.2 BC547.2 | length 56.6
  Top Layer w0.35: BC547.2 13.435,20.39 v1(16.35,17.475) ; v1(30.65,16.2) 30.758,16.2 31.358,16.8 51.25,16.8 52.95,18.5 52.95,29.101 220Ω.2
  Bottom Layer w0.35: v1(16.35,17.475) 17.475,16.35 30.5,16.35 v1(30.65,16.2)
NetR12_2: 50KΩ.2 100KΩ.2@60.727,27.369 | length 27.9
  Top Layer w0.35: 50KΩ.2 42.936,13.752 52.698,13.752 v1(52.7,13.75)
  Bottom Layer w0.35: v1(52.7,13.75) 54.875,15.925 54.875,21.518 100KΩ.2@60.727,27.369
NetR14_1: 10KΩ.1@50.471,18.947 20KΩ.1@47.792,10.35 | length 13.1
  Top Layer w0.35: 20KΩ.1@47.792,10.35 51.5,10.35 v2(52,10.85)
  Bottom Layer w0.35: 10KΩ.1@50.471,18.947 50.471,15.876 51.975,14.373 51.975,12.682 52,12.657 v2(52,10.85)
NetR15_1: 20KΩ.1@50.471,23.158 100KΩ.1@56.05,10.35 | length 21.9
  Bottom Layer w0.35: 20KΩ.1@50.471,23.158 48.125,20.812 48.125,11.85 50.875,9.1 54.8,9.1 100KΩ.1@56.05,10.35
PR+: PROBES.1 SW1.B | length 100.2
  Top Layer w0.35: v1(3.025,14.075) 3.025,13.875 3.925,12.975 v1(6.025,12.975) ; v1(9.8,12.975) 10.752,12.975 14.077,9.65 PROBES.1
  Bottom Layer w0.35: v1(3.025,14.075) 3.025,75.625 8.65,81.25 12.7,81.25 15.959,77.991 15.959,72.432 15.959,71.25 SW1.B@16.275,70.934 ; v1(6.025,12.975) v1(9.8,12.975)
PR-: PROBES.2 SW1.C | length 109.9
  Top Layer w0.35: v1(2.25,17.225) 2.25,17.125 2.95,16.425 v1(5.675,16.425) ; v1(10.875,14.775) 11.025,14.925 14.35,14.925 17.344,11.931 19.45,9.825 PROBES.2
  Bottom Layer w0.35: v1(2.25,17.225) 2.15,17.225 2.15,21.3 2.15,76.1 10.45,84.4 16.7,84.4 21.734,79.366 21.734,75.766 21.734,74.584 SW1.C@22.05,74.268 ; v1(5.675,16.425) 7.325,14.775 v1(10.875,14.775)
RESET: 10KΩ.1@35.01,35.791 100nF.2 ATMEGA328P.1 | length 24.2
  Top Layer w0.35: v1(39.075,35.85) 40.525,37.3 40.525,43.265 ATMEGA328P.1
  Bottom Layer w0.35: 100nF.2 28.743,43.265 ATMEGA328P.1 ; 10KΩ.1@35.01,35.791 36.991,35.791 37.05,35.85 v1(39.075,35.85)
ROT5: 1MΩ.1@29.804,27.369 SW1.5 | length 52.5
  Top Layer w0.3: v1(11.075,58.5) 11.075,62.327 11.833,63.085 SW1.5@12.276,63.085 ; v1(27.2,56.475) 27.175,56.45 27.175,29.998 1MΩ.1@29.804,27.369
  Bottom Layer w0.3: v1(11.075,58.5) 11.975,57.6 26.125,57.6 27.2,56.525 v1(27.2,56.475)
ROT6: INA219.6 SW1.6 | length 135.7
  Top Layer w0.6: SW1.6@9.403,68.061 9.403,68.504 14.525,73.626 14.525,83.275 17.05,85.8 70.525,85.8 78.05,78.275 78.05,40.284 77.125,39.359 v1(77.125,39.25)
  Bottom Layer w0.6: INA219.6 68.875,36.855 74.755,36.855 77.125,39.225 v1(77.125,39.25)
ROT9: 1N4001.2 SW1.9 | length 31.3
  Top Layer w0.3: 1N4001.2 20.166,63.466 v1(20.2,63.5)
  Bottom Layer w0.3: SW1.9@17.252,81.656 17.252,81.261 18.039,80.474 18.95,79.563 18.95,65.55 20.2,64.3 v1(20.2,63.5) ; 1N4001.2@20.075,51.812 1N4001.2
ROT10: INA219.5 SW1.10 | length 109.1
  Top Layer w0.6: SW1.10@22.998,81.656 22.998,82.099 25.399,84.5 69.875,84.5 76.9,77.475 76.9,41.578 75.3,39.978 75.3,36.725 72.89,34.315 68.811,34.315 INA219.5
ROT12: 220Ω.1 R20.2 SW1.12 | length 111.8
  Top Layer w0.3: SW1.12@30.847,73.807 30.521,74.132 30.521,75.214 30.521,78.421 35.675,83.575 68.775,83.575 75.832,76.518 76.071,42.021 73.4,39.35 64.125,39.35 60.727,35.952 R20.2 220Ω.1
RX: ATMEGA328P.2 FTDI.3 | length 38.2
  Top Layer w0.35: ATMEGA328P.2 43.13,42.545 v1(45.985,39.69)
  Bottom Layer w0.35: FTDI.3@14.722,34.521 16.221,34.521 19.85,38.15 43.075,38.15 44.445,38.15 v1(45.985,39.69)
TX: ATMEGA328P.3 FTDI.2 | length 34.9
  Bottom Layer w0.35: FTDI.2@14.722,37.061 16.086,37.061 17.875,38.85 43.575,38.85 45.67,40.945 ATMEGA328P.3
VCC: 10KΩ.2@45.266,35.791 "LCD HEADER.2" ATMEGA328P.7 ATMEGA328P.20 FTDI.4 INA219.1 POWER.1 SW1.A | length 240.3
  Top Layer w0.35: SW1.A@22.05,67.6 21.607,67.6 12.15,58.143 12.15,49.32 14.475,46.995 16.425,45.045 16.425,33.684 14.722,31.981 11.756,31.981 7.5,27.725 POWER.1 10.564,6.586 73.412,6.586 78.125,11.299 78.125,18.65 72.62,24.155 68.69,24.155 67.068,24.155 INA219.1 ; v1(41.7,19.8) 41.7,32.226 45.266,35.791 46.1,36.625 46.1,37.316 49.409,40.625 53.19,40.625 ATMEGA328P.7 55.144,43.951 55.144,47.914 56.305,49.075 58.775,49.075 60.585,50.885 ATMEGA328P.20 ; v1(45.45,15.925) 61.2,15.925 64.625,19.35 66.462,21.187 66.462,23.568 INA219.1@66.937,24.043
  Bottom Layer w0.35: v1(41.7,19.8) 41.7,18.125 43.9,15.925 v1(45.45,15.925)
pads on no net: 1KΩ.3 10KΩ.3 20KΩ.3 50KΩ.3 100KΩ.3 ATMEGA328P.21 ATMEGA328P.25 ATMEGA328P.26 FTDI.5 SW2.5 SW2.6 SW2.7 SW2.8 SW2.9 SW2.10 SW2.11 SW2.12 SW2.B SW2.C

## Polygon pours and split planes (outlines as drawn)
GND on Bottom Layer "GND_L02_P001" (solid, pour order 1): 0.7,88.2 0.7,0.725 79.65,0.725 79.65,88.2
VCC on Top Layer "VCC_L01_P000" (solid, pour order 0): 0.7,88.2 0.7,0.725 79.65,0.725 79.65,88.2

## Silkscreen, mask and mechanical layers (free items; w line width, h text height)
Top Overlay:
  drawing of 169 lines, arcs and shapes, not listed
  text "1MΩ" at 54.16,35.5 h1.52
  text "-" at 10.65,7.059 h2
  text "+" at 6.975,7.04 h2

## Text inside footprints (layer, text, board x,y; h text height)
BUZZER: Top Overlay "1" at 69.365,18.41 h1.52; Top Overlay "2" at 69.365,15.725 h1.52
FTDI: Top Overlay "5" at 11.935,28.705 h1.52; Top Overlay "4" at 11.935,31.245 h1.52; Top Overlay "3" at 11.935,33.785 h1.52; Top Overlay "6" at 11.935,26.165 h1.52; Top Overlay "2" at 11.935,36.325 h1.52; Top Overlay "1" at 11.935,39.01 h1.52
INA219: Top Overlay "5" at 69.365,34.95 h1.52 r180; Top Overlay "3" at 69.365,29.87 h1.52 r180; Top Overlay "6" at 69.365,37.49 h1.52 r180; Top Overlay "2" at 69.365,27.33 h1.52 r180; Top Overlay "1" at 69.365,24.645 h1.52 r180
"LCD HEADER": Top Overlay "1" at 11.935,44.945 h1.52 r180; Top Overlay "2" at 11.935,47.63 h1.52 r180; Top Overlay "3" at 11.935,50.17 h1.52 r180; Top Overlay "4" at 11.935,52.71 h1.52 r180